# EAGLE board Daniel (EAGLE 8.6.3)
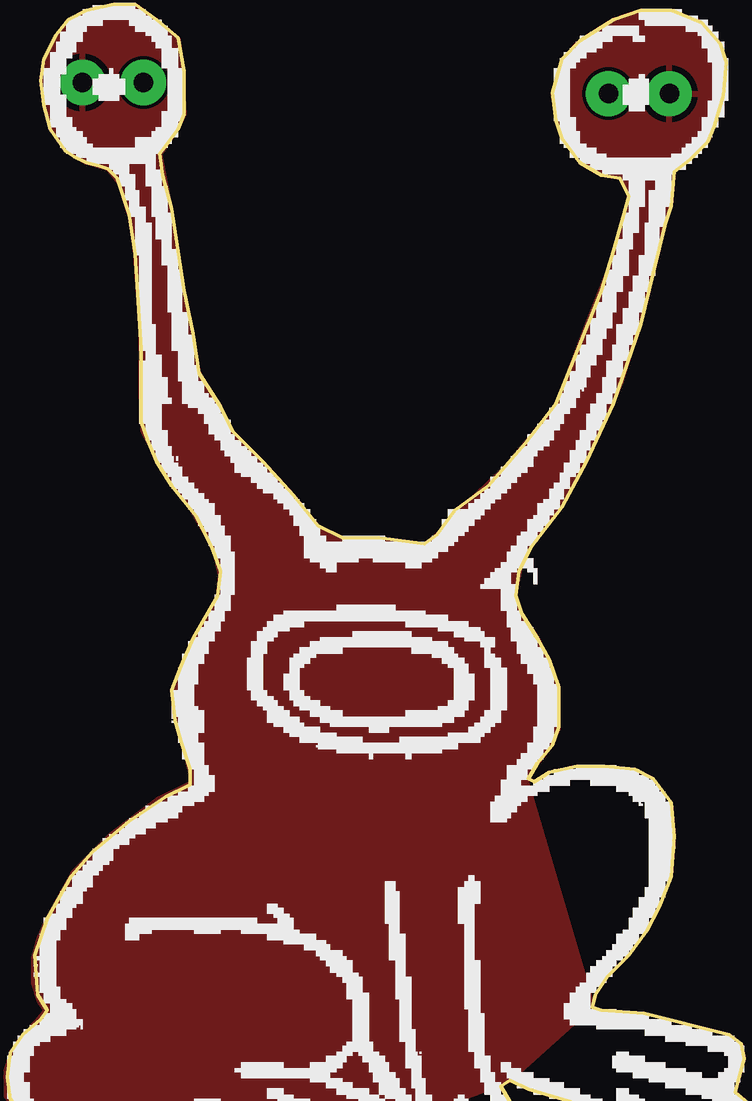
[diagram p0: board, top side]
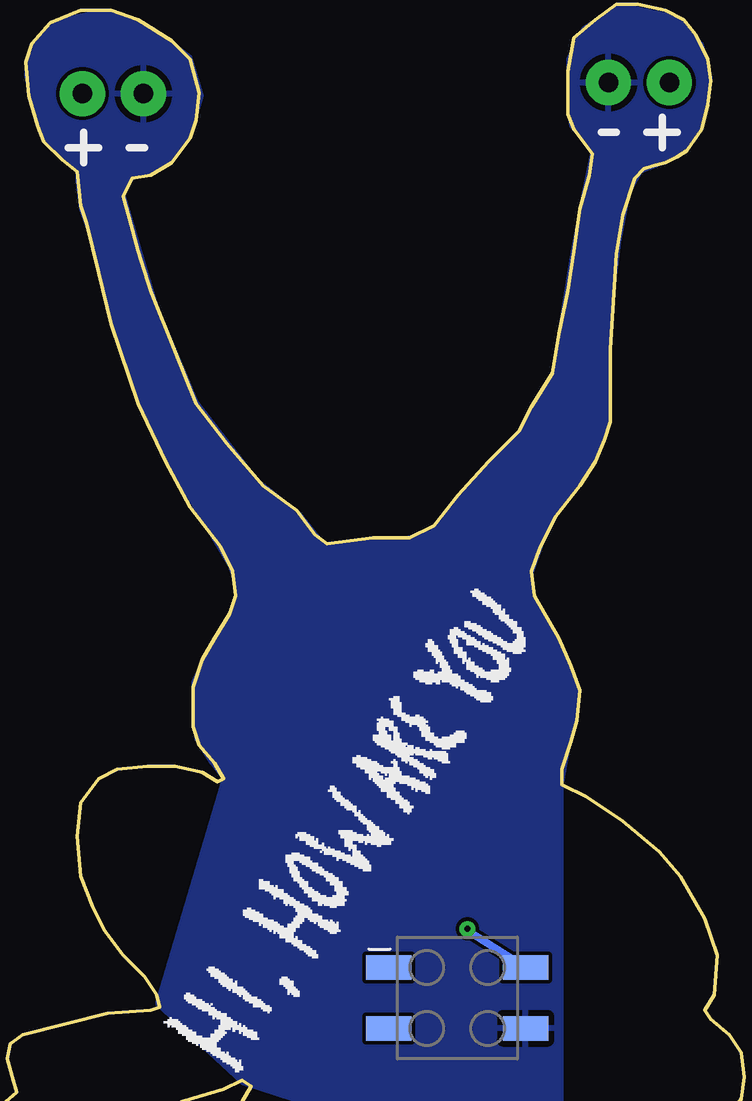
[diagram p1: board, bottom side, seen from below]

No outline drawn. Coordinates in mm, seen from the top.
Copper layers (1*16): Top 0.035mm / dielectric 1.5mm / Bottom 0.035mm
Design rules "default": minimum track width 6mil, minimum drill 0.35mm, track to track 6mil, track to pad 6mil, pad to pad 6mil, via to via 6mil, smd to smd 6mil, copper to edge 40mil, drill to drill 6mil, minimum pad ring 10mil, minimum via ring 8mil, stop-mask expansion 4mil, vias tented up to drill 0mil, thermal gap 10mil
Milling: 195 lines

## Footprints (pad centres in the part's own frame; a part is rotated, then mirrored left to right if it is on the bottom)
LED_5MM_NOSILK = drill 0.813 pad 1.88: A -1.27,0; K 1.27,0
2X2_SMD = smd 1.02 x 1.9: 1 -1.27,-2.85; 2 -1.27,2.85; 3 1.27,-2.85; 4 1.27,2.85

## Placement (x,y rotation side)
D3  [LED_5MM_NOSILK]  4.78,46.53 0 top
D4  [LED_5MM_NOSILK]  26.71,46.06 0 bottom
U$1  CONN_2X2  [2X2_SMD]  12.36,8.38 270 bottom

## Library data of the parts
D3 D4 = SparkFun-LED
U$1 = SparkFun-Connectors

## Nets
GND: D3.K D4.K U$1.4
VCC: D3.A D4.A U$1.2

## Tracks (layer width: path | path; a pad name or v marks a point on that pad's centre or on a via)
GND
  pour Bottom: 6.73,43.69 7.62,44.7 7.75,45.47 7.75,47.5 7.11,48.77 5.59,49.78 3.17,49.28 2.16,48.13 1.78,46.74 2.03,45.34 2.41,44.2 3.05,43.56 4.06,43.05 4.7,42.8 5.21,41.91 5.59,40.01 5.97,36.83 5.97,33.4 5.97,32.38 6.86,30.48 8.51,28.19 9.27,26.04 9.14,25.02 8,22.86 7.24,21.21 7.75,18.67 8,17.27 8,2.29 10.92,1.14 11.68,1.27 12.32,1.4 12.7,2.03 21.34,4.83 24.89,8.13 22.1,17.53 22.61,18.16 23.24,19.18 23.37,20.32 23.37,21.59 22.35,23.5 21.46,25.15 21.84,26.42 22.99,28.32 24.77,31.37 26.16,34.67 26.92,37.21 27.56,39.88 28.07,41.27 28.19,42.42 28.19,42.93 29.46,43.94 30.1,45.59 30.35,46.86 30.1,48.13 28.96,49.15 27.05,49.53 25.02,48.77 23.5,47.62 22.99,45.97 23.5,44.32 24.13,43.43 24.89,42.8 25.91,42.55 26.29,41.91 24.89,37.21 23.24,33.27 20.7,29.97 18.92,28.57 17.91,27.3 16.64,27.43 14.48,27.56 13.46,27.81 12.19,29.46 9.78,32 8.38,34.29 7.62,39.12 7.11,41.78
VCC  (via drill 0.25)
  Bottom 0.305: U$1.2 12.06,11.26 v11.94,11.26
  pour Top: 7.7,47.07 7.53,48.34 5.76,49.69 4.74,49.78 2.88,49.1 1.95,47.41 1.86,46.22 2.2,44.53 2.79,43.68 3.64,43.18 4.57,42.92 5.08,42.24 5.5,40.81 5.67,39.62 5.93,36.23 5.93,33.52 6.01,32 6.77,30.56 7.96,28.87 8.97,27.09 9.23,25.99 9.14,25.14 8.21,23.45 7.28,21.33 7.37,20.4 7.7,18.96 8.04,17.52 7.96,2.29 9.99,1.69 11.01,1.1 12.36,1.44 12.61,1.95 16.85,3.22 21.33,4.91 24.8,8.04 22.01,17.52 22.94,18.71 23.37,19.56 23.37,21.16 22.52,23.37 21.5,24.89 21.93,26.92 23.28,28.53 24.21,30.14 25.23,32.25 25.99,34.03 27.01,37.33 27.34,38.77 28.19,42.92 29.63,44.11 30.22,45.97 30.31,47.41 29.97,48.26 29.12,49.19 27.51,49.53 25.74,49.19 24.04,48.09 23.45,47.32 23.11,45.97 23.37,44.61 24.04,43.6 24.97,42.84 25.91,42.58 26.33,41.74 25.48,38.86 24.55,36.49 23.28,33.1 21.16,30.56 19.56,29.04 18.46,27.85 17.78,27.26 14.39,27.51 13.29,28.02 9.82,31.92 8.38,34.46 7.7,37.84 7.2,41.4 6.77,43.51 7.45,44.53 7.79,45.21 7.7,46.65
  pour Top: 8,17.27 6.73,16.64 4.7,15.11 3.17,13.59 2.03,11.56 1.78,10.92 1.52,10.03 1.52,9.02 1.78,8.26 2.03,7.87 1.52,7.24 0.64,6.1 0.38,5.33 0.38,4.32 1.02,3.56 1.65,3.05 2.92,2.54 4.06,2.41 5.59,2.41 7.49,2.29 8.13,2.29 8.38,17.53